# Altium PCB FPGA_DB.PcbDoc (part 3 of 5)
Units mil, origin at the board's own origin, x right, y up, seen from the top; angles counter-clockwise.
Board outline 5980 x 6510 mil, 4 copper layers (Top, Ground Plane, Power Plane, Bottom), stack 61.497 mil thick; 140 components, 246 nets, 1021 pads, 2685 vias.
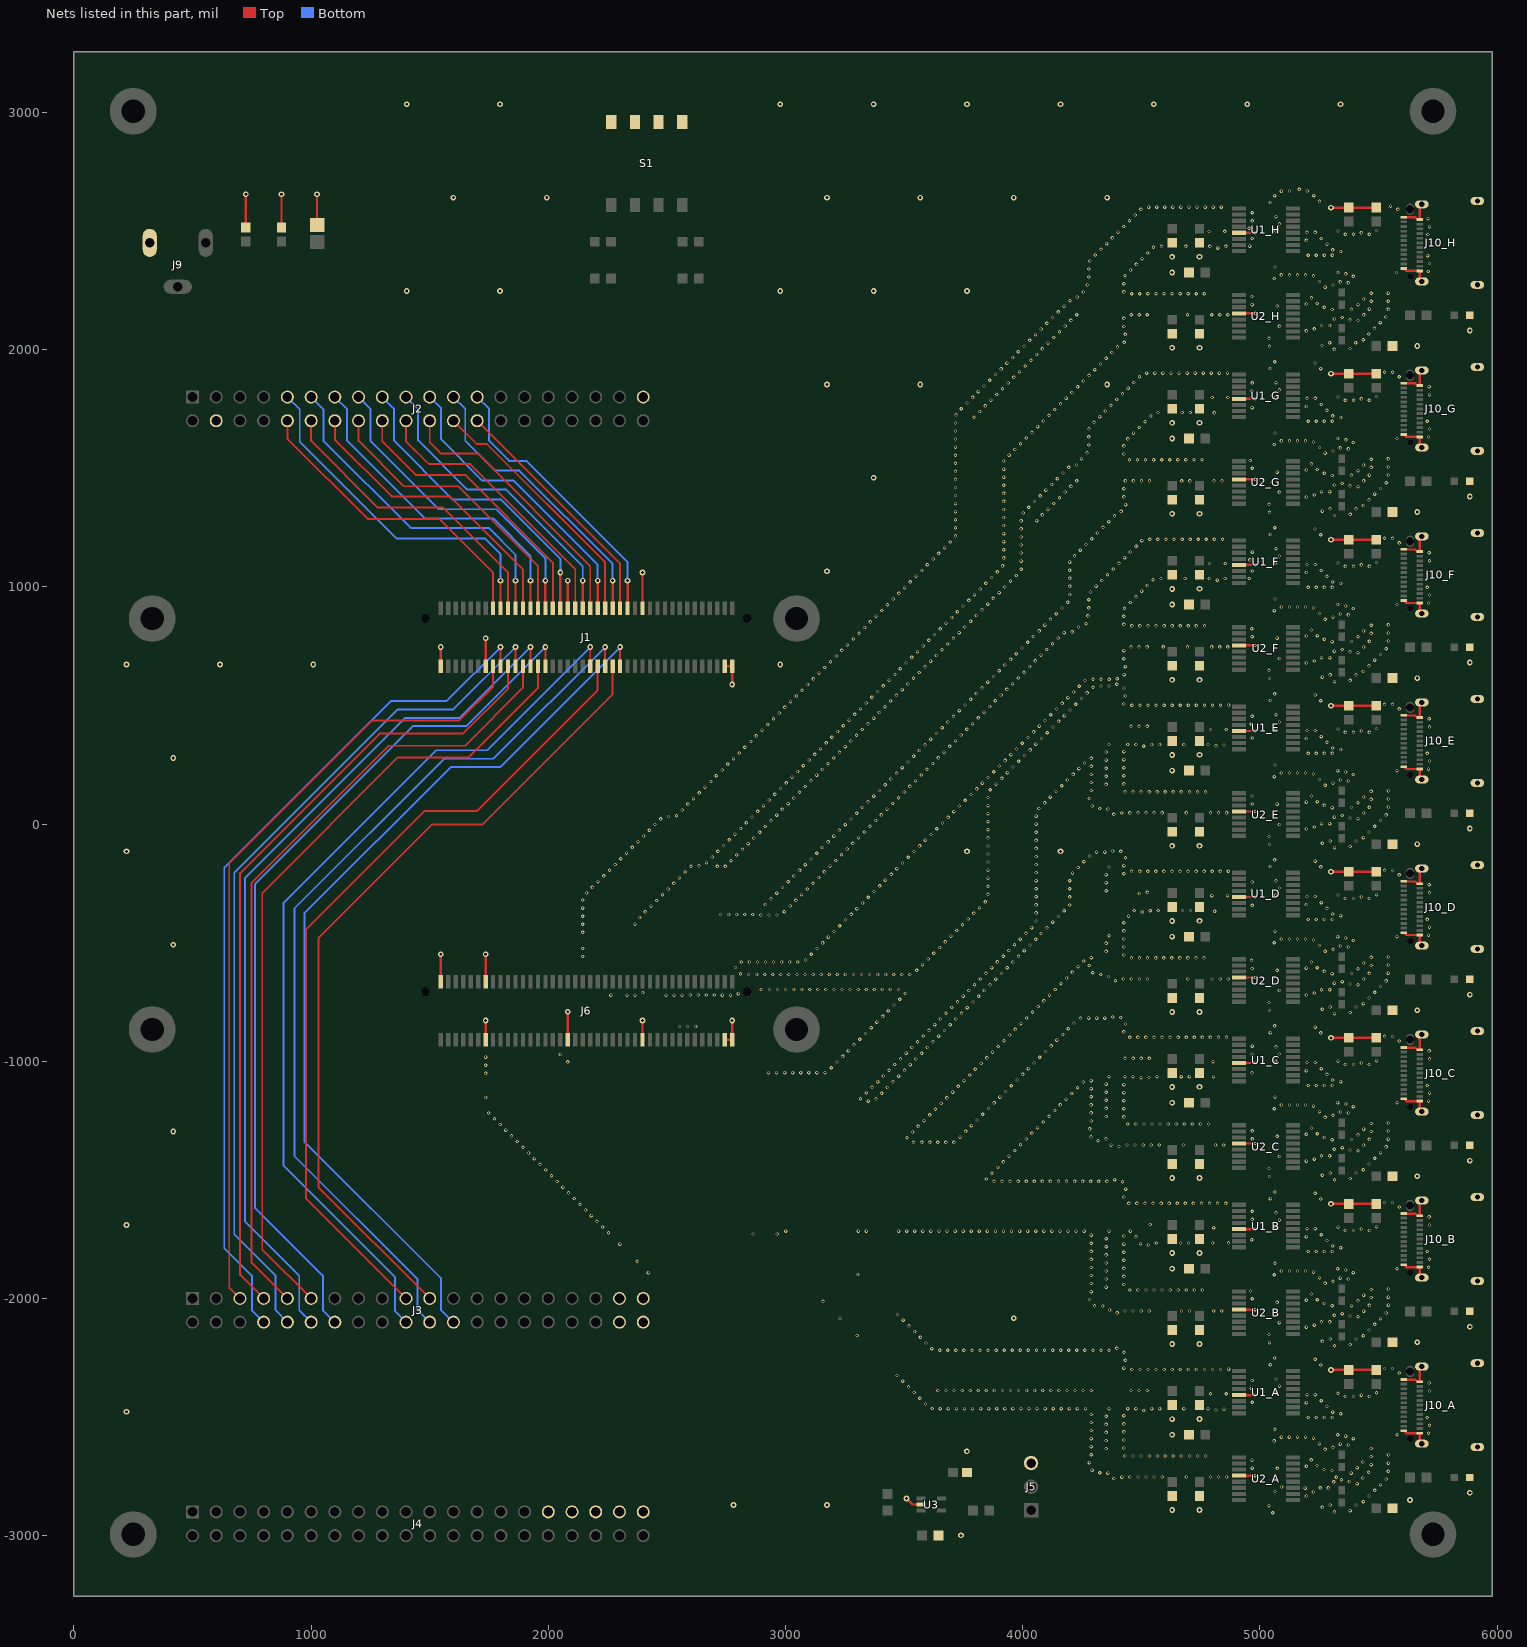
[diagram p5: the nets of this part, all layers, seen from the top]

## Via types
v1: diameter 14, hole 8, Top to Bottom, tented both sides, 2392 vias
v2: diameter 24, hole 12, Top to Bottom, tented both sides, 293 vias

## Nets (pads, with @x,y where several pads share a name; then routed paths per layer and width w, separated by ;. In a path a pad name is that pad's centre, name@x,y a point inside that pad or via, vN(x,y) a via of type N, cw(c..) or ccw(c..) an arc to the next point about the centre after c; other vN are vias at no path point) (continued)
GND: C1.1 C2.1 C3.1 C4.1 C6_A.1 C6_B.1 C6_C.1 C6_D.1 C6_E.1 C6_F.1 C6_G.1 C6_H.1 C7_A.1 C7_B.1 C7_C.1 C7_D.1 C7_E.1 C7_F.1 C7_G.1 C7_H.1 C8_A.2 C8_B.2 C8_C.2 C8_D.2 C8_E.2 C8_F.2 C8_G.2 C8_H.2 C9_A.2 C9_B.2 C9_C.2 C9_D.2 C9_E.2 C9_F.2 C9_G.2 C9_H.2 C10_A.2 C10_B.2 C10_C.2 C10_D.2 C10_E.2 C10_F.2 C10_G.2 C10_H.2 C11_A.2 C11_B.2 C11_C.2 C11_D.2 C11_E.2 C11_F.2 C11_G.2 C11_H.2 D1_A.1 D1_B.1 D1_C.1 D1_D.1 D1_E.1 D1_F.1 D1_G.1 D1_H.1 J1.02 J1.14 J1.35 J1.55 J1.78 J1.80 J2.04 J2.39 J3.37 J3.38 J3.39 J3.40 J4.31 J4.33 J4.35 J4.37 J4.39 J5.3 J6.01 J6.13 J6.14 J6.36 J6.56 J6.78 J6.80 J9.2 J10_A.1 J10_A.2 J10_A.3 J10_A.4 J10_A.A1 J10_A.A12 J10_A.B1 J10_A.B12 J10_B.1 J10_B.2 J10_B.3 J10_B.4 J10_B.A1 J10_B.A12 J10_B.B1 J10_B.B12 J10_C.1 J10_C.2 J10_C.3 J10_C.4 J10_C.A1 J10_C.A12 J10_C.B1 J10_C.B12 J10_D.1 J10_D.2 J10_D.3 J10_D.4 J10_D.A1 J10_D.A12 J10_D.B1 J10_D.B12 J10_E.1 J10_E.2 J10_E.3 J10_E.4 J10_E.A1 J10_E.A12 J10_E.B1 J10_E.B12 J10_F.1 J10_F.2 J10_F.3 J10_F.4 J10_F.A1 J10_F.A12 J10_F.B1 J10_F.B12 J10_G.1 J10_G.2 J10_G.3 J10_G.4 J10_G.A1 J10_G.A12 J10_G.B1 J10_G.B12 J10_H.1 J10_H.2 J10_H.3 J10_H.4 J10_H.A1 J10_H.A12 J10_H.B1 J10_H.B12 R7_A.1 R7_B.1 R7_C.1 R7_D.1 R7_E.1 R7_F.1 R7_G.1 R7_H.1 R10_A.1 R10_B.1 R10_C.1 R10_D.1 R10_E.1 R10_F.1 R10_G.1 R10_H.1 R12.2 S1.1B S1.2B S1.3B S1.4B U1_A.5 U1_B.5 U1_C.5 U1_D.5 U1_E.5 U1_F.5 U1_G.5 U1_H.5 U2_A.12 U2_B.12 U2_C.12 U2_D.12 U2_E.12 U2_F.12 U2_G.12 U2_H.12 U3.2 | length 6375.6
  Top w10: C3.1@725,2514.53 v2(725,2655) ; C2.1@875,2514.53 v2(875,2655) ; C1.1@1025,2525.43 v2(1025,2655) ; J6.01@1546.73,-665.98 v2(1546.73,-548.81) ; J1.02@1546.73,665.83 v2(1546.73,746) ; J6.14@1735.71,-908.98 v2(1735.71,-828.8) ; J6.13@1735.71,-665.98 v2(1735.71,-548.81) ; J1.14@1735.71,665.83 v2(1735.71,783) ; J6.36@2082.17,-908.98 v2(2082.17,-791.8) ; J1.35@2082.17,908.82 v2(2082.17,1026) ; J6.56@2397.13,-908.98 v2(2397.13,-828.8) ; J1.55@2397.13,908.82 v2(2397.13,1060) ; J6.78@2743.58,-908.98 J6.80@2775.08,-908.98 v2(2775.08,-828.8) ; J1.78@2743.58,665.83 J1.80@2775.08,665.83 v2(2775.08,587.91) ; v2(3510,-2843.39) 3535.59,-2868.98 U3.2@3571.69,-2868.98 ; U2_A.12@4910.83,-2747.2 v1(4980.45,-2747.2) ; U1_A.5@4910.83,-2407.8 v1(4980.45,-2407.8) ; U2_B.12@4910.83,-2047.2 v1(4980.45,-2047.2) ; U1_B.5@4910.83,-1707.8 v1(4980.45,-1707.8) ; U2_C.12@4910.83,-1347.2 v1(4980.45,-1347.2) ; U1_C.5@4910.83,-1007.8 v1(4980.45,-1007.8) ; U2_D.12@4910.83,-647.2 v1(4980.45,-647.2) ; U1_D.5@4910.83,-307.8 v1(4980.45,-307.8) ; U2_E.12@4910.83,52.8 v1(4980.45,52.8) ; U1_E.5@4910.83,392.2 v1(4980.45,392.2) ; U2_F.12@4910.83,752.8 v1(4980.45,752.8) ; U1_F.5@4910.83,1092.2 v1(4980.45,1092.2) ; U2_G.12@4910.83,1452.8 v1(4980.45,1452.8) ; U1_G.5@4910.83,1792.2 v1(4980.45,1792.2) ; U2_H.12@4910.83,2152.8 v1(4980.45,2152.8) ; U1_H.5@4910.83,2492.2 v1(4980.45,2492.2) ; v2(5300,-2301.5) C7_A.1@5375,-2301.5 C6_A.1@5490,-2301.5 ; v2(5300,-1601.5) C7_B.1@5375,-1601.5 C6_B.1@5490,-1601.5 ; v2(5300,-901.5) C7_C.1@5375,-901.5 C6_C.1@5490,-901.5 ; v2(5300,-201.5) C7_D.1@5375,-201.5 C6_D.1@5490,-201.5 ; v2(5300,498.5) C7_E.1@5375,498.5 C6_E.1@5490,498.5 ; v2(5300,1198.5) C7_F.1@5375,1198.5 C6_F.1@5490,1198.5 ; v2(5300,1898.5) C7_G.1@5375,1898.5 C6_G.1@5490,1898.5 ; v2(5300,2598.5) C7_H.1@5375,2598.5 C6_H.1@5490,2598.5 ; J10_A.A1@5607.17,-2558.27 5617.01,-2568.11 J10_A.B12@5674.09,-2568.11 5674.09,-2604.33 J10_A.3@5682.36,-2612.6 ; J10_A.A12@5607.17,-2341.73 5608.04,-2342.61 5654.21,-2342.61 5663.17,-2351.57 J10_A.B1@5674.09,-2351.57 5674.09,-2295.67 J10_A.4@5682.36,-2287.4 ; J10_B.A1@5607.17,-1858.27 5617.01,-1868.11 J10_B.B12@5674.09,-1868.11 5674.09,-1904.33 J10_B.3@5682.36,-1912.6 ; J10_B.A12@5607.17,-1641.73 5608.04,-1642.61 5654.21,-1642.61 5663.17,-1651.57 J10_B.B1@5674.09,-1651.57 5674.09,-1595.67 J10_B.4@5682.36,-1587.4 ; J10_C.A1@5607.17,-1158.27 5617.01,-1168.11 J10_C.B12@5674.09,-1168.11 5674.09,-1204.33 J10_C.3@5682.36,-1212.6 ; J10_C.A12@5607.17,-941.73 5608.04,-942.61 5654.21,-942.61 5663.17,-951.57 J10_C.B1@5674.09,-951.57 5674.09,-895.67 J10_C.4@5682.36,-887.4 ; J10_D.A1@5607.17,-458.27 5617.01,-468.11 J10_D.B12@5674.09,-468.11 5674.09,-504.33 J10_D.3@5682.36,-512.6 ; J10_D.A12@5607.17,-241.73 5608.04,-242.61 5654.21,-242.61 5663.17,-251.57 J10_D.B1@5674.09,-251.57 5674.09,-195.67 J10_D.4@5682.36,-187.4 ; J10_E.A1@5607.17,241.73 5617.01,231.89 J10_E.B12@5674.09,231.89 5674.09,195.67 J10_E.3@5682.36,187.4 ; J10_E.A12@5607.17,458.27 5608.04,457.39 5654.21,457.39 5663.17,448.43 J10_E.B1@5674.09,448.43 5674.09,504.33 J10_E.4@5682.36,512.6 ; J10_F.A1@5607.17,941.73 5617.01,931.89 J10_F.B12@5674.09,931.89 5674.09,895.67 J10_F.3@5682.36,887.4 ; J10_F.A12@5607.17,1158.27 5608.04,1157.39 5654.21,1157.39 5663.17,1148.43 J10_F.B1@5674.09,1148.43 5674.09,1204.33 J10_F.4@5682.36,1212.6 ; J10_G.A1@5607.17,1641.73 5617.01,1631.89 J10_G.B12@5674.09,1631.89 5674.09,1595.67 J10_G.3@5682.36,1587.4 ; J10_G.A12@5607.17,1858.27 5608.04,1857.39 5654.21,1857.39 5663.17,1848.43 J10_G.B1@5674.09,1848.43 5674.09,1904.33 J10_G.4@5682.36,1912.6 ; J10_H.A1@5607.17,2341.73 5617.01,2331.89 J10_H.B12@5674.09,2331.89 5674.09,2295.67 J10_H.3@5682.36,2287.4 ; J10_H.A12@5607.17,2558.27 5608.04,2557.39 5654.21,2557.39 5663.17,2548.43 J10_H.B1@5674.09,2548.43 5674.09,2604.33 J10_H.4@5682.36,2612.6
  other v1: 5054.17,-2903.49 5314.69,-2899.66 5380.35,-2894.54 5263.35,-2880.97 5038.05,-2873.55 5295.94,-2871.3 5405.16,-2871.3 5436.2,-2857.41 5195.87,-2833.31 5460.24,-2833.37 5225.33,-2816.33 5063.82,-2814.28 5484.28,-2809.33 5190.89,-2799.68 5254.49,-2798.86 5288.49,-2798.7 5091.72,-2794.84 5508.32,-2785.29 5409.94,-2781.01 5311.22,-2773.41 5377.21,-2771.8 5344.02,-2764.46 5532.37,-2761.24 4384.26,-2759.38 5433.99,-2756.97 4417.77,-2753.59 5322.39,-2753.88 4451.77,-2753.18 4485.77,-2753.18 4519.77,-2753.18 4553.77,-2753.18 4587.77,-2753.18 4689.77,-2753.18 4791.77,-2753.18 4825.77,-2753.18 4859.77,-2753.18 4358.77,-2736.88 5384.58,-2736.58 4324.83,-2735 5458.03,-2732.92 5541.66,-2728.54 5303.99,-2725.29 4292.58,-2724.22 5270.22,-2721.3 5073.01,-2716.54 4967.59,-2715.64 5409.69,-2713.66 5195.57,-2707.61 5240.49,-2704.81 5469.07,-2700.77 5541.66,-2694.54 4280.95,-2692.27 5433.89,-2689.78 4966.86,-2681.65 5216.45,-2680.77 5469.07,-2666.77 4430.83,-2664.46 4464.83,-2664.46 4498.83,-2664.46 4532.83,-2664.46 4566.83,-2664.46 4600.83,-2664.46 4634.83,-2664.46 4668.83,-2664.46 4702.83,-2664.46 4736.83,-2664.46 4770.83,-2664.46 5541.66,-2660.54 4288.44,-2659.11 5274.87,-2636.53 4351.56,-2632.81 5469.07,-2632.77 4426.56,-2630.73 5307.76,-2627.92 4288.44,-2625.11 5372.76,-2618.38 5338.98,-2614.46 5250.83,-2612.49 5060.14,-2600.54 4351.56,-2598.81 4426.56,-2596.73 4288.44,-2591.11 5393.44,-2591.4 5225.99,-2589.26 5090.29,-2584.82 5124.29,-2584.82 5158.29,-2584.82 5192.29,-2584.82 5361.19,-2580.63 5327.68,-2574.88 5578.24,-2574.88 5711.01,-2568.53 4351.56,-2564.81 4426.56,-2562.73 4288.44,-2557.11 5063.34,-2551.59 5715.09,-2534.78 4351.56,-2530.81 4426.56,-2528.73 4288.44,-2523.11 5203.59,-2502.29 5237.59,-2502.29 5271.59,-2502.29 5305.59,-2502.29 5705.34,-2502.2 4351.56,-2496.81 4426.56,-2494.73 4288.44,-2489.11 5340.18,-2486.3 5306.88,-2479.42 4510.15,-2472.36 4814.89,-2470.38 4848.73,-2467.07 3652.51,-2464.95 3686.51,-2464.95 3720.51,-2464.95 3754.51,-2464.95 3788.51,-2464.95 3822.51,-2464.95 3856.51,-2464.95 3890.51,-2464.95 3924.51,-2464.95 3958.51,-2464.95 3992.51,-2464.95 4026.51,-2464.95 4060.51,-2464.95 4094.51,-2464.95 4128.51,-2464.95 4162.51,-2464.95 4196.51,-2464.95 4230.51,-2464.95 4264.51,-2464.95 4363.44,-2464.95 4442.97,-2464.95 4476.97,-2464.95 4543.33,-2464.95 4577.33,-2464.95 4679.33,-2464.95 4781.33,-2464.95 3618.52,-2464.36 5282.67,-2455.55 3590.49,-2445.12 5195.93,-2439.58 4967.59,-2437.8 5258.63,-2431.51 3566.44,-2421.08 5360.4,-2413.7 5394.4,-2413.7 5461.32,-2413.7 5427.86,-2407.66 5198.83,-2405.71 5232.83,-2405.71 4791.94,-2401.82 4858.26,-2401.82 5066.93,-2399.99 5329.44,-2399.65 5491.31,-2397.7 3542.4,-2397.04 5715.11,-2390.28 3642.44,-2388.18 3676.44,-2388.18 3710.44,-2388.18 3744.44,-2388.18 3778.44,-2388.18 3812.44,-2388.18 3846.44,-2388.18 3880.44,-2388.18 3914.44,-2388.18 3948.44,-2388.18 3982.44,-2388.18 4016.44,-2388.18 4050.44,-2388.18 4084.44,-2388.18 4118.44,-2388.18 4152.44,-2388.18 4186.44,-2388.18 4220.44,-2388.18 4254.44,-2388.18 4288.44,-2388.18 4456.39,-2388.18 4490.39,-2388.18 4524.39,-2388.18 4963.49,-2379.68 3518.36,-2373 5082.86,-2369.95 5713.36,-2356.32 3494.32,-2348.96 4967.34,-2345.9 5067.64,-2339.54 3470.28,-2324.91 5587.47,-2314.59 4460.11,-2299.46 4494.11,-2299.46 4528.11,-2299.46 4562.11,-2299.46 4596.11,-2299.46 4630.11,-2299.46 4664.11,-2299.46 4698.11,-2299.46 4732.11,-2299.46 4766.11,-2299.46 4800.11,-2299.46 4834.11,-2299.46 4868.1,-2298.41 5559.22,-2295.67 5525.22,-2295.42 4426.56,-2293.94 5256.65,-2280.55 5043.92,-2279.52 4432.83,-2260.53 5232.6,-2256.51 5062.6,-2251.11 4426.86,-2227.06 3649.98,-2218.44 3683.98,-2218.44 3717.98,-2218.44 3751.98,-2218.44 3785.98,-2218.44 3819.98,-2218.44 3853.98,-2218.44 3887.98,-2218.44 3921.98,-2218.44 3955.98,-2218.44 3989.98,-2218.44 4023.98,-2218.44 4057.98,-2218.44 4091.98,-2218.44 4125.98,-2218.44 4159.98,-2218.44 4193.98,-2218.44 4227.98,-2218.44 4261.98,-2218.44 4295.98,-2218.44 4329.98,-2218.44 4363.98,-2218.44 3616.6,-2211.97 4397.08,-2210.65 5314.69,-2199.66 5380.35,-2194.54 3592.56,-2187.92 5040.65,-2186.37 5263.35,-2180.97 5295.94,-2171.3 5405.16,-2171.3 3568.52,-2163.88 3301.99,-2156.62 5436.2,-2157.41 5038.09,-2152.46 3544.48,-2139.84 5460.24,-2133.37 5195.93,-2121.19 3520.44,-2115.8 5228.88,-2112.78 5484.28,-2109.33 5081.82,-2102.01 5259.83,-2098.7 5293.83,-2098.7 3496.39,-2091.76 5508.32,-2085.29 3229.86,-2084.5 5413.4,-2077.55 5379.55,-2074.41 5313.69,-2071.11 3472.35,-2067.72 5347.03,-2064.46 4398.08,-2060.77 5532.37,-2061.24 5437.44,-2053.51 4431.22,-2053.18 4465.22,-2053.18 4499.22,-2053.18 4533.22,-2053.18 4669.22,-2053.18 4703.22,-2053.18 4805.22,-2053.18 4839.22,-2053.18 4366.32,-2048.61 4336.84,-2031.68 4302.84,-2031.46 5304.35,-2031.08 5385.74,-2030.39 5461.49,-2029.47 5541.66,-2028.54 5271.79,-2021.3 5072.85,-2016.47 3157.74,-2012.37 5413.25,-2010.42 5195.55,-2007.78 5241.51,-2005.83 4281.74,-2004.8 4967.59,-2001.56 5469.07,-1996.32 5541.66,-1994.54 5437.3,-1986.37 5217.47,-1981.79 4288.44,-1971.47 4960,-1968.42 4451.38,-1964.46 4485.38,-1964.46 4519.38,-1964.46 4553.38,-1964.46 4587.38,-1964.46 4621.38,-1964.46 4655.38,-1964.46 4689.38,-1964.46 4723.38,-1964.46 4757.38,-1964.46 5469.07,-1962.32 5541.66,-1960.54 4351.56,-1952.42 4426.56,-1941.22 4288.44,-1937.47 5274.98,-1936.64 5307.82,-1927.84 4351.56,-1918.42 5372.84,-1918.45 5339.08,-1914.46 5250.94,-1912.6 4426.56,-1907.22 4288.44,-1903.47 5060.24,-1900.43 3304.06,-1899.43 2421.93,-1891.57 5393.44,-1891.4 5226.15,-1889.33 5090.45,-1884.82 5124.45,-1884.82 5158.45,-1884.82 5192.45,-1884.82 4351.56,-1884.42 5361.19,-1880.63 5327.68,-1874.88 5578.24,-1874.88 4426.56,-1873.22 4288.44,-1869.47 5711.01,-1868.53 5063.34,-1851.59 4351.56,-1850.42 2373.85,-1843.49 4426.56,-1839.22 4288.44,-1835.47 5715.09,-1834.78 4351.56,-1816.42 4426.56,-1805.22 5203.59,-1802.29 5237.59,-1802.29 5271.59,-1802.29 5305.59,-1802.29 5705.34,-1802.2 4288.44,-1801.47 5340.18,-1786.3 4351.56,-1782.42 5306.88,-1779.42 4529.82,-1774.51 2301.73,-1771.36 4426.56,-1771.22 4496.23,-1769.21 4288.44,-1767.47 4562.91,-1766.72 4664.91,-1766.72 4698.91,-1766.72 4800.91,-1766.72 4867.88,-1765.91 5282.67,-1755.55 4965.25,-1752.68 4351.56,-1748.42 4477.69,-1740.71 5195.93,-1739.58 4426.56,-1737.22 4288.44,-1733.47 5258.63,-1731.51 2862.8,-1728.44 2964.8,-1728.44 2253.64,-1723.28 3000.94,-1716.56 3306.94,-1716.56 3340.94,-1716.56 3476.94,-1716.56 3510.94,-1716.56 3544.94,-1716.56 3578.94,-1716.56 3612.94,-1716.56 3646.94,-1716.56 3680.94,-1716.56 3714.94,-1716.56 3748.94,-1716.56 3782.94,-1716.56 3816.94,-1716.56 3850.94,-1716.56 3884.94,-1716.56 3918.94,-1716.56 3952.94,-1716.56 3986.94,-1716.56 4020.94,-1716.56 4054.94,-1716.56 4088.94,-1716.56 4122.94,-1716.56 4156.94,-1716.56 4190.94,-1716.56 4224.94,-1716.56 4258.94,-1716.56 4363.44,-1716.56 4453.65,-1716.67 5360.4,-1713.7 5394.4,-1713.7 5461.32,-1713.7 5427.86,-1707.66 5198.83,-1705.71 5232.83,-1705.71 4805.24,-1701.76 5066.93,-1699.99 5329.44,-1699.65 2229.6,-1699.24 5491.31,-1697.7 5715.11,-1690.28 4536.99,-1688.18 2205.56,-1675.2 5082.86,-1669.95 4967.41,-1666.78 5713.36,-1656.32 2181.52,-1651.15 5067.64,-1639.54 4967.59,-1632.79 2157.48,-1627.11 5587.47,-1614.59 2133.43,-1603.07 4447.39,-1599.46 4481.39,-1599.46 4515.39,-1599.46 4549.39,-1599.46 4583.39,-1599.46 4617.39,-1599.46 4651.39,-1599.46 4685.39,-1599.46 4719.39,-1599.46 4753.39,-1599.46 4787.39,-1599.46 4821.39,-1599.46 4855.39,-1599.46 5559.22,-1595.67 5525.22,-1595.42 5256.65,-1580.55 5043.92,-1579.52 2109.39,-1579.03 4426.56,-1572.59 5232.6,-1556.51 2085.35,-1554.99 5062.6,-1551.11 4434.39,-1539.5 2061.31,-1530.95 4420.8,-1508.33 2037.27,-1506.9 3878.74,-1506.44 3912.74,-1506.44 3946.74,-1506.44 3980.74,-1506.44 4014.74,-1506.44 4048.74,-1506.44 4082.74,-1506.44 4116.74,-1506.44 4150.74,-1506.44 4184.74,-1506.44 4218.74,-1506.44 4252.74,-1506.44 4286.74,-1506.44 4320.74,-1506.44 4354.74,-1506.44 5314.69,-1499.66 4388,-1499.39 3846.24,-1496.45 5380.35,-1494.54 5040.65,-1486.37 2013.23,-1482.86 5263.35,-1480.97 3870.28,-1472.41 5295.94,-1471.3 5405.16,-1471.3 1989.19,-1458.82 5436.2,-1457.41 5038.09,-1452.46 3894.32,-1448.36 1965.14,-1434.78 5460.24,-1433.37 3918.36,-1424.32 5195.93,-1421.19 5228.88,-1412.78 1941.1,-1410.74 5484.28,-1409.33 5081.82,-1402.01 3942.4,-1400.28 5259.83,-1398.7 5293.83,-1398.7 1917.06,-1386.7 5508.32,-1385.29 5413.4,-1377.55 3966.45,-1376.24 5379.55,-1374.41 5313.69,-1371.11 5347.03,-1364.46 1893.02,-1362.65 5532.37,-1361.24 4406.09,-1359.26 4372.53,-1353.79 5437.44,-1353.51 4439.54,-1353.18 4473.54,-1353.18 4507.54,-1353.18 4541.54,-1353.18 4575.54,-1353.18 4677.54,-1353.18 4813.54,-1353.18 4847.54,-1353.18 3990.49,-1352.2 3539.75,-1342.3 3573.75,-1342.3 3607.75,-1342.3 3641.75,-1342.3 3675.75,-1342.3 3709.75,-1342.3 1868.98,-1338.61 4317.76,-1335.34 5304.35,-1331.08 5385.74,-1330.39 5461.49,-1329.47 5541.66,-1328.54 4014.53,-1328.16 4350.86,-1327.59 4967.59,-1327.44 3512.05,-1322.59 5271.79,-1321.3 3735.4,-1319.97 4288.04,-1318.82 5072.85,-1316.47 1844.94,-1314.57 5413.25,-1310.42 5195.55,-1307.78 5241.51,-1305.83 4038.57,-1304.12 3536.09,-1298.55 3759.44,-1295.93 5469.07,-1296.32 5541.66,-1294.54 4967.59,-1293.44 1820.89,-1290.53 5437.3,-1286.37 4282.23,-1285.32 5217.47,-1281.79 4062.61,-1280.07 3560.13,-1274.51 3783.48,-1271.89 1796.85,-1266.49 4442.94,-1264.46 4476.94,-1264.46 4510.94,-1264.46 4544.94,-1264.46 4578.94,-1264.46 4612.94,-1264.46 4646.94,-1264.46 4680.94,-1264.46 4714.94,-1264.46 4748.94,-1264.46 4782.94,-1264.46 5469.07,-1262.32 5541.66,-1260.54 4086.65,-1256.03 4288.44,-1251.89 3584.17,-1250.46 3807.52,-1247.84 1772.81,-1242.45 5274.98,-1236.64 4426.56,-1234.66 4351.56,-1232.81 4110.69,-1231.99 5307.82,-1227.84 3608.21,-1226.42 3831.56,-1223.8 1748.77,-1218.4 4288.44,-1217.89 5372.84,-1218.45 5339.08,-1214.46 5250.94,-1212.6 4134.74,-1207.95 3632.26,-1202.38 4426.56,-1200.66 3855.6,-1199.76 5060.24,-1200.43 4351.56,-1198.81 5393.44,-1191.4 5226.15,-1189.33 5090.45,-1184.82 5124.45,-1184.82 5158.45,-1184.82 5192.45,-1184.82 4158.78,-1183.91 4288.44,-1183.89 5361.19,-1180.63 3656.3,-1178.34 3879.64,-1175.72 5327.68,-1174.88 5578.24,-1174.88 5711.01,-1168.53 3348.74,-1168.44 4426.56,-1166.66 4351.56,-1164.81 4182.82,-1159.87 3381.4,-1158.97 3316.26,-1158.37 3680.34,-1154.3 1735.64,-1153.04 3903.69,-1151.68 5063.34,-1151.59 4288.44,-1149.89 4206.86,-1135.82 3405.44,-1134.93 5715.09,-1134.78 3340.31,-1134.33 4426.56,-1132.66 4351.56,-1130.81 3704.38,-1130.26 3927.73,-1127.64 4288.44,-1115.89 4230.9,-1111.78 3429.48,-1110.89 3364.35,-1110.29 3728.42,-1106.21 3951.77,-1103.59 5203.59,-1102.29 5237.59,-1102.29 5271.59,-1102.29 5305.59,-1102.29 5705.34,-1102.2 4426.56,-1098.66 4351.56,-1096.81 4254.94,-1087.74 3453.52,-1086.84 3388.39,-1086.25 5340.18,-1086.3 3752.46,-1082.17 4288.44,-1081.89 3975.81,-1079.55 5306.88,-1079.42 4498.69,-1069.25 4532.68,-1068.48 4363.44,-1064.95 4430.96,-1064.95 4464.96,-1064.95 4566.49,-1064.95 4668.49,-1064.95 4702.49,-1064.95 4804.49,-1064.95 3477.56,-1062.8 3412.43,-1062.21 3776.51,-1058.13 3999.85,-1055.51 5282.67,-1055.55 1735.64,-1051.04 4966.7,-1049.01 2928.17,-1048.44 2962.17,-1048.44 2996.17,-1048.44 3030.17,-1048.44 3064.17,-1048.44 3098.17,-1048.44 3132.17,-1048.44 3166.17,-1048.44 5195.93,-1039.58 3501.6,-1038.76 3436.47,-1038.16 3800.55,-1034.09 5258.63,-1031.51 4023.89,-1031.47 3192.92,-1027.45 1735.64,-1017.04 3525.64,-1014.72 3460.51,-1014.12 5360.4,-1013.7 5394.4,-1013.7 5461.32,-1013.7 3824.59,-1010.05 5427.86,-1007.66 4047.94,-1007.43 5198.83,-1005.71 5232.83,-1005.71 2082.1,-1002.58 3216.96,-1003.4 4802.03,-1001.82 5066.93,-999.99 5329.44,-999.65 5491.31,-997.7 3549.69,-990.68 3484.56,-990.08 5715.11,-990.28 4431.37,-988.18 4465.37,-988.18 4499.37,-988.18 4533.37,-988.18 3848.63,-986.01 1735.64,-983.04 4071.98,-983.39 3241,-979.36 2050.74,-971.48 4966.94,-970.39 5082.86,-969.95 3573.73,-966.64 3508.6,-966.04 3872.67,-961.96 4096.02,-959.34 5713.36,-956.32 3265.04,-955.32 3597.77,-942.59 3532.64,-942 5067.64,-939.54 3896.71,-937.92 4967.59,-936.39 4120.06,-935.3 3289.08,-931.28 3621.81,-918.55 3556.68,-917.96 5587.47,-914.59 3920.75,-913.88 4144.1,-911.26 3313.13,-907.24 4451.23,-899.46 4485.23,-899.46 4519.23,-899.46 4553.23,-899.46 4587.23,-899.46 4621.23,-899.46 4655.23,-899.46 4689.23,-899.46 4723.23,-899.46 4757.23,-899.46 4791.23,-899.46 4825.23,-899.46 4859.23,-899.46 5559.22,-895.67 3645.85,-894.51 5525.22,-895.42 3580.72,-893.91 3944.8,-889.84 4168.14,-887.22 3337.17,-883.2 5256.65,-880.55 5043.92,-879.52 4426.56,-876.07 3604.76,-869.87 3669.89,-870.47 3968.84,-865.8 4192.19,-863.18 3361.21,-859.15 5232.6,-856.51 2552.95,-853.4 2586.95,-853.4 2620.95,-853.4 5062.6,-851.11 3628.81,-845.83 3693.94,-846.43 4433.57,-842.79 3992.88,-841.76 4216.23,-839.14 3385.25,-835.11 3652.85,-821.79 3717.98,-822.39 4243.81,-819.25 4016.92,-817.71 4277.8,-818.44 4311.8,-818.44 4345.8,-818.44 4413.45,-815.38 4379.49,-813.86 3409.29,-811.07 5314.69,-799.66 3676.89,-797.75 3742.02,-798.34 5380.35,-794.54 4040.96,-793.67 3433.33,-787.03 5040.65,-786.37 5263.35,-780.97 3700.93,-773.71 3766.06,-774.3 5295.94,-771.3 5405.16,-771.3 4065,-769.63 3457.38,-762.99 5436.2,-757.41 5038.09,-752.46 3724.97,-749.66 3790.1,-750.26 4089.05,-745.59 3481.42,-738.95 5460.24,-733.37 3749.01,-725.62 3814.14,-726.22 2263.79,-721.56 2331.79,-721.56 2365.79,-721.56 2495.79,-721.56 2529.79,-721.56 2563.79,-721.54 2767.78,-721.56 4113.09,-721.55 2597.79,-721.21 2631.78,-720.88 2665.78,-720.8 2699.78,-721.13 2733.78,-721.46 5195.93,-721.19 2801.19,-715.23 3505.46,-714.9 5228.88,-712.78 2397.89,-710.36 5484.28,-709.33 3773.06,-701.58 3838.19,-702.18 5081.82,-702.01 5259.83,-698.7 5293.83,-698.7 2898.22,-697.55 2932.22,-697.55 2966.22,-697.55 3000.22,-697.55 3034.22,-697.55 3068.22,-697.55 3102.22,-697.55 3136.22,-697.55 3170.22,-697.55 3204.22,-697.55 3238.22,-697.55 3272.22,-697.55 3306.22,-697.55 3340.22,-697.55 3374.22,-697.55 3408.22,-697.55 3442.22,-697.55 3476.22,-697.55 4137.13,-697.51 5508.32,-685.29 3797.1,-677.54 3862.23,-678.14 5413.4,-677.55 5379.55,-674.41 4161.17,-673.47 5313.69,-671.11 5347.03,-664.46 4391.01,-660.65 5532.37,-661.24 3886.27,-654.09 5437.44,-653.51 3821.14,-653.5 4424.18,-653.18 4458.18,-653.18 4492.18,-653.18 4526.18,-653.18 4696.18,-653.18 4798.18,-653.18 4832.18,-653.18 4866.18,-653.18 4185.21,-649.42 4362.02,-642.88 2844.29,-634.42 2878.29,-634.42 2912.29,-634.42 2946.29,-634.42 2980.29,-634.42 3014.29,-634.42 3048.29,-634.42 3082.29,-634.42 3116.29,-634.42 3150.29,-634.42 3184.29,-634.42 3218.29,-634.42 3252.29,-634.42 3286.29,-634.42 3320.29,-634.42 3354.29,-634.42 3388.29,-634.42 3422.29,-634.42 3456.29,-634.42 3490.29,-634.42 3524.29,-634.42 4329.15,-634.21 2810.45,-631.12 5304.35,-631.08 3910.31,-630.05 5385.74,-630.39 3845.18,-629.46 5461.49,-629.47 5541.66,-628.54 4295.91,-627.05 4209.25,-625.38 5271.79,-621.3 3553.44,-616.92 5072.85,-616.47 5413.25,-610.42 4967.08,-608.94 5195.55,-607.78 3934.35,-606.01 5241.51,-605.83 2788.8,-604.9 3869.22,-605.41 4233.3,-601.34 4280.67,-596.66 5469.07,-596.32 5541.66,-594.54 3577.48,-592.88 5437.3,-586.37 2813.53,-581.56 2847.53,-581.56 2881.53,-581.56 2915.53,-581.56 2949.53,-581.56 2983.53,-581.56 3017.53,-581.56 3051.53,-581.56 3958.39,-581.97 5217.47,-581.79 3893.26,-581.37 4257.34,-577.3 4964.55,-575.04 3084.43,-573 3601.52,-568.84 4288.44,-563.56 4458.4,-564.46 4492.4,-564.46 4526.4,-564.46 4560.4,-564.46 4594.4,-564.46 4628.4,-564.46 4662.4,-564.46 4696.4,-564.46 4730.4,-564.46 4764.4,-564.46 5469.07,-562.32 5541.66,-560.54 2145.09,-558.75 3982.44,-557.93 3917.31,-557.33 4426.56,-552.52 3108.57,-549.06 3625.57,-544.8 4351.56,-537.06 5274.98,-536.64 4006.48,-533.89 3941.35,-533.29 5307.82,-527.84 2145.09,-524.75 3132.62,-525.02 3649.61,-520.76 4426.56,-518.52 5372.84,-518.45 5339.08,-514.46 5250.94,-512.6 4030.52,-509.84 3965.39,-509.25 4351.56,-503.06 3156.66,-500.98 5060.24,-500.43 3673.65,-496.72 5393.44,-491.4 5226.15,-489.33 4054.56,-485.8 3989.43,-485.21 4426.56,-484.52 5090.45,-484.82 5124.45,-484.82 5158.45,-484.82 5192.45,-484.82 5361.19,-480.63 3180.7,-476.94 5327.68,-474.88 5578.23,-474.88 3697.69,-472.67 4363.44,-471.2 5711.01,-468.53 4078.6,-461.76 4013.47,-461.16 2145.09,-456.75 3204.74,-452.89 5063.34,-451.59 4426.56,-450.52 3721.73,-448.63 4102.64,-437.72 4037.51,-437.12 5715.09,-434.78 3228.78,-428.85 3745.77,-424.59 2145.09,-422.75 2365.7,-422.38 4426.56,-416.52 4126.69,-413.68 4056.27,-408.77 3252.82,-404.81 5203.59,-402.29 5237.59,-402.29 5271.59,-402.29 5305.59,-402.29 5705.34,-402.2 3769.81,-400.55 2385.14,-394.49 4150.73,-389.64 2145.09,-388.75 4446.01,-388.63 5340.18,-386.3 2896.04,-383.44 2930.04,-383.44 2964.04,-383.44 2726.09,-381.56 2760.09,-381.56 2794.09,-381.56 2828.09,-381.56 2862.09,-381.33 3276.87,-380.77 5306.88,-379.42 3793.86,-376.51 4056.56,-374.77 4503.86,-371.01 2409.18,-370.44 2995.3,-370.07 4809.31,-367.63 4174.77,-365.59 4537.43,-365.59 4470.41,-364.95 4571.42,-364.95 4673.42,-364.95 4707.42,-364.95 3300.91,-356.73 5282.67,-355.55 2145.09,-354.75 3817.9,-352.47 2433.23,-346.4 3019.34,-346.02 4967.47,-343.13 4056.56,-340.77 4198.44,-341.19 2915.12,-339.52 5195.93,-339.58 3324.95,-332.69 5258.63,-331.51 3841.94,-328.42 2457.27,-322.36 3043.38,-321.98 2145.09,-320.75 2939.16,-315.48 5360.4,-313.7 5394.4,-313.7 5461.32,-313.7 3348.99,-308.65 5427.86,-307.66 4056.56,-306.77 4198.44,-307.19 5198.83,-305.71 5232.83,-305.71 4797.2,-301.82 4863.37,-301.82 5066.93,-299.99 5329.44,-299.65 2481.31,-298.32 3067.42,-297.94 5491.31,-297.7 3853.44,-296.43 4491.89,-292.74 2161.43,-290.93 2963.2,-291.44 5715.11,-290.28 4525.58,-288.18 3373.03,-284.6 4351.56,-281.42 4964.18,-278.51 2505.35,-274.28 3091.46,-273.9 4056.56,-272.77 4198.44,-273.19 5082.86,-269.95 2185.47,-266.89 2987.24,-267.39 3853.44,-262.43 3397.07,-260.56 5713.36,-256.32 2529.39,-250.24 3115.51,-249.86 4351.56,-247.42 4967.18,-244.65 2209.51,-242.85 3011.28,-243.35 5067.64,-239.54 4056.56,-238.77 4198.44,-239.19 3421.12,-236.52 3853.44,-228.43 2553.43,-226.19 3139.55,-225.82 2233.55,-218.81 3035.33,-219.31 5587.47,-214.59 4351.56,-213.42 3445.16,-212.48 4426.56,-209.68 4209.55,-207.05 4056.56,-204.77 2577.48,-202.15 3163.59,-201.77 4458.99,-199.46 4492.99,-199.46 4526.99,-199.46 4560.99,-199.46 4594.99,-199.46 4628.99,-199.46 4662.99,-199.46 4696.99,-199.46 4730.99,-199.46 4764.99,-199.46 4798.99,-199.46 4832.99,-199.46 4866.99,-199.11 5559.22,-195.67 2257.6,-194.77 3059.37,-195.27 5525.22,-195.42 3853.44,-194.43 3469.2,-188.44 4233.59,-183.01 4363.44,-181.56 5256.65,-180.55 5043.92,-179.52 2601.52,-178.11 2712.08,-178.44 2746.08,-178.44 3187.63,-177.73 2635.48,-176.56 4426.56,-175.68 2281.64,-170.73 3083.41,-171.23 4056.56,-170.77 3493.24,-164.4 2666.65,-162.98 3853.44,-160.43 4257.64,-158.97 5232.6,-156.51 2770.54,-154.83 3211.67,-153.69 5062.6,-151.11 2305.68,-146.68 3107.45,-147.19 4433.49,-142.39 3517.28,-140.35 2690.69,-138.94 4056.56,-136.77 4281.68,-134.93 2794.58,-130.78 3235.71,-129.65 3853.44,-126.43 2329.72,-122.64 3131.49,-123.14 4311.41,-118.44 4345.41,-118.44 3541.32,-116.31 2714.74,-114.9 4413.1,-115.19 4379.12,-113.99 2818.62,-106.74 3259.76,-105.61 4056.56,-102.77 5314.69,-99.66 2353.76,-98.6 3155.53,-99.1 5380.35,-94.54 3565.37,-92.27 3853.44,-92.43 2738.78,-90.86 5040.65,-86.37 2842.66,-82.7 3283.8,-81.57 5263.35,-80.97 2377.8,-74.56 3179.58,-75.06 5295.94,-71.3 5405.16,-71.3 4056.56,-68.77 3589.41,-68.23 2762.82,-66.82 2866.71,-58.66 3307.84,-57.52 3853.44,-58.43 5436.2,-57.41 5038.09,-52.46 2401.85,-50.52 3203.62,-51.02 3613.45,-44.19 2786.86,-42.78 2890.75,-34.62 4056.56,-34.77 3331.88,-33.48 5460.24,-33.37 3227.66,-26.98 2425.89,-26.48 3853.44,-24.43 5195.93,-21.19 3637.49,-20.15 2810.9,-18.73 5228.88,-12.78 2914.79,-10.58 3355.92,-9.44 5484.28,-9.33 3251.7,-2.94 2449.93,-2.43 5081.82,-2.01 4056.56,-0.77 5259.83,1.3 5293.83,1.3 3661.53,3.9 2834.94,5.31 3853.44,9.57 2938.83,13.47 3379.96,14.6 5508.32,14.71 3275.74,21.11 2473.97,21.61 5413.4,22.45 5379.55,25.59 3685.57,27.94 2858.99,29.35 5313.69,28.89 2506.48,31.56 4056.56,33.23 2540.31,34.95 5347.03,35.54 2962.87,37.51 3404.01,38.64 5532.37,38.75 4384.17,40.66 3853.44,43.57 3299.78,45.15 4417.69,46.36 5437.44,46.49 4451.68,46.82 4485.68,46.82 4519.68,46.82 4553.68,46.82 4587.68,46.82 4689.68,46.82 4791.68,46.82 4825.68,46.82 4859.68,46.82 3709.62,51.98 2883.03,53.39 2564.35,58.99 2986.91,61.55 3428.05,62.68 4358.74,63.22 4068.2,65.18 4324.79,65 3323.83,69.19 5304.35,68.92 5385.74,69.61 5461.49,70.53 5541.66,71.46 3733.66,76.02 4292.55,75.81 2907.07,77.43 3853.44,77.57 5271.79,78.7 2588.39,83.03 4967.59,84.27 5072.85,83.53 3010.96,85.59 3452.09,86.73 4092.24,89.22 5413.25,89.58 5195.55,92.22 3347.87,93.23 5241.51,94.17 3757.7,100.06 2931.11,101.47 5469.07,103.68 5541.66,105.46 2612.44,107.07 4280.96,107.77 3035,109.63 3476.13,110.77 3853.44,111.57 4116.28,113.26 5437.3,113.63 3371.91,117.27 4966.87,118.26 5217.47,118.21 3781.74,124.1 2955.15,125.52 2636.48,131.11 3059.04,133.67 3500.17,134.81 4430.91,135.54 4464.91,135.54 4498.91,135.54 4532.91,135.54 4566.91,135.54 4600.91,135.54 4634.91,135.54 4668.91,135.54 4702.91,135.54 4736.91,135.54 4770.91,135.54 4140.33,137.3 5469.07,137.68 5541.66,139.46 3395.95,141.31 4288.44,140.94 3862.96,144.21 3805.78,148.15 2979.19,149.56 2660.52,155.16 3083.08,157.72 3524.21,158.85 4164.37,161.34 5274.98,163.36 3419.99,165.36 4351.56,167.19 3887,168.25 4426.56,169.26 3829.82,172.19 5307.82,172.16 3003.24,173.6 4288.44,174.94 2684.56,179.2 3107.12,181.76 5372.84,181.55 3548.26,182.89 4188.41,185.39 5339.08,185.54 5250.94,187.4 3444.03,189.4 3911.04,192.3 3853.87,196.23 3027.28,197.64 5060.24,199.57 4351.56,201.19 2708.6,203.24 4426.56,203.26 3131.16,205.8 3572.3,206.93 4212.45,209.43 4288.44,208.94 5393.44,208.6 5226.15,210.67 3468.08,213.44 5090.45,215.18 5124.45,215.18 5158.45,215.18 5192.45,215.18 3935.09,216.34 5361.19,219.37 3877.91,220.27 3051.32,221.68 5327.68,225.12 5578.23,225.12 2732.64,227.28 3155.2,229.84 3596.34,230.98 5711.01,231.47 4236.49,233.47 4351.56,235.19 3492.12,237.48 4426.56,237.26 3959.13,240.38 4288.44,242.94 3901.95,244.31 3075.36,245.72 5063.34,248.41 2756.69,251.32 3179.25,253.88 3620.38,255.02 4260.53,257.51 3516.16,261.52 3983.17,264.42 5715.09,265.22 3925.99,268.35 4351.56,269.19 3099.4,269.77 4426.56,271.26 2780.73,275.36 4288.44,276.94 3203.29,277.92 3644.42,279.06 3540.2,285.56 4007.21,288.46 3950.03,292.4 3123.44,293.81 5203.59,297.71 5237.59,297.71 5271.59,297.71 5305.59,297.71 5705.34,297.8 2804.77,299.41 3227.33,301.97 3668.46,303.1 4351.56,303.19 4426.56,305.26 3564.24,309.61 4031.25,312.5 5340.18,313.7 3974.07,316.44 3147.49,317.85 5306.88,320.58 2828.81,323.45 3251.37,326.01 3692.51,327.14 4510.13,327.64 4814.88,329.63 4848.72,332.92 3588.28,333.65 4363.44,335.05 4442.95,335.05 4476.95,335.05 4543.31,335.05 4577.31,335.05 4679.31,335.05 4781.31,335.05 4055.29,336.54 3998.12,340.48 3171.53,341.89 5282.67,344.45 2852.85,347.49 3275.41,350.05 3716.55,351.18 3612.32,357.69 5195.93,360.42 4079.34,360.59 4967.59,362.19 4022.16,364.52 3195.57,365.93 5258.63,368.49 2876.89,371.53 3299.45,374.09 3740.59,375.22 3636.37,381.73 4103.38,384.63 5360.4,386.3 5394.4,386.3 5461.32,386.3 4046.2,388.56 3219.61,389.97 5427.86,392.34 5198.83,394.29 5232.83,394.29 2900.94,395.57 3323.5,398.13 4791.96,398.18 4858.27,398.18 3764.63,399.27 5066.93,400.01 5329.44,400.35 5491.31,402.3 3660.41,405.77 4127.42,408.67 5715.11,409.73 4456.4,411.82 4490.4,411.82 4524.4,411.82 4070.24,412.6 3243.65,414.02 2924.98,419.61 4963.5,420.34 3347.54,422.17 3788.67,423.31 3684.45,429.81 5082.86,430.05 4151.46,432.71 4094.28,436.65 3267.69,438.06 2949.02,443.66 5713.36,443.68 3371.58,446.22 3812.71,447.35 3708.49,453.86 4967.34,454.12 4175.5,456.75 5067.64,460.46 4118.32,460.69 3291.73,462.1 2973.06,467.7 3395.62,470.26 3836.76,471.39 3732.53,477.9 4199.54,480.79 4142.37,484.73 5587.47,485.42 3315.78,486.14 2997.1,491.74 3419.66,494.3 3860.8,495.43 4460.1,500.54 4494.1,500.54 4528.1,500.54 4562.1,500.54 4596.1,500.54 4630.1,500.54 4664.1,500.54 4698.1,500.54 4732.1,500.54 4766.1,500.54 4800.1,500.54 4834.1,500.54 3756.57,501.94 4868.08,501.58 5559.22,504.33 4223.59,504.84 5525.22,504.58 4426.56,506.14 4166.41,508.77 3339.82,510.18 3021.14,515.78 3443.7,518.34 3884.84,519.47 5256.64,519.45 5043.92,520.48 3780.62,525.98 4247.63,528.88 4190.45,532.81 3363.86,534.22 3045.19,539.82 4432.86,539.55 3467.75,542.38 5232.6,543.49 3908.88,543.52 5062.6,548.89 3804.66,550.02 4271.67,552.92 4214.49,556.85 3387.9,558.27 3069.23,563.86 3491.79,566.42 3932.92,567.56 4426.81,573.01 3828.7,574.06 4296.31,576.34 4238.53,580.9 3411.94,582.31 4329.91,581.56 4363.91,581.56 3093.27,587.91 4397,589.37 3515.83,590.47 3956.96,591.6 3852.74,598.1 5314.69,600.35 4262.57,604.94 5380.35,605.45 3435.98,606.35 4296.19,610.05 4330.19,610.05 4364.19,610.05 3117.31,611.95 4398.1,612.47 5040.65,613.63 3539.87,614.51 3981,615.64 5263.34,619.02 3876.78,622.15 5295.93,628.7 5405.15,628.7 3460.03,630.39 4427.47,629.59 3141.35,635.99 3563.91,638.55 4005.05,639.68 5436.19,642.58 3900.82,646.19 5038.09,647.54 3484.07,654.43 3165.39,660.03 3587.95,662.59 4432.47,663.22 4029.09,663.72 5460.23,666.62 3924.87,670.23 3508.11,678.47 5195.93,678.81 3189.44,684.07 3612,686.63 5228.88,687.22 4053.13,687.77 5484.27,690.66 3948.91,694.27 4426.56,696.71 5081.82,697.99 5259.83,701.3 5293.83,701.3 3532.15,702.51 3213.48,708.11 3636.04,710.67 4077.17,711.81 5508.32,714.7 3972.95,718.31 5413.4,722.45 5379.55,725.59 3556.19,726.56 5313.69,728.89 4426.56,730.71 3237.52,732.15 3660.08,734.72 4101.21,735.85 5347.03,735.54 5532.36,738.75 3996.99,742.35 5437.44,746.49 4456.5,746.82 4490.5,746.82 4524.5,746.82 4592.5,746.82 4694.5,746.82 4796.5,746.82 4830.5,746.82 4864.5,746.82 3580.23,750.6 3261.56,756.2 3684.12,758.76 4125.25,759.89 4021.03,766.4 5304.35,768.92 5385.74,769.61 5461.49,770.53 5541.66,771.45 3604.28,774.64 5271.79,778.7 3285.6,780.24 3708.16,782.8 4149.3,783.93 5072.85,783.53 4967.33,789.21 4045.07,790.44 5413.25,789.58 5195.55,792.22 5241.51,794.17 3628.32,798.68 3309.64,804.28 5469.07,803.68 5541.66,805.45 3732.2,806.84 4174.72,806.5 4208.55,809.95 4069.12,814.48 5437.3,813.63 5217.47,818.21 3652.36,822.72 4965.31,823.15 3333.69,828.32 3756.25,830.88 4235.37,830.85 4460.01,835.54 4494.01,835.54 4528.01,835.54 4562.01,835.54 4596.01,835.54 4630.01,835.54 4664.01,835.54 4698.01,835.54 4732.01,835.54 4766.01,835.54 5469.07,837.68 4093.16,838.52 5541.66,839.45 4426.56,841.64 4266.55,844.39 3676.4,846.76 3357.73,852.36 3780.29,854.92 4117.2,862.56 5274.98,863.36 3700.44,870.81 5307.82,872.16 3381.77,876.4 4426.56,875.64 4274.72,877.4 3804.33,878.97 5372.84,881.55 5339.08,885.54 4141.24,886.6 5250.94,887.4 3724.48,894.85 3405.81,900.45 5060.24,899.57 3828.37,903.01 5393.44,908.6 4429.18,909.54 4165.28,910.65 4278.44,911.19 5226.15,910.67 5090.45,915.18 5124.45,915.18 5158.45,915.18 5192.45,915.18 3748.53,918.89 5361.19,919.37 3429.85,924.49 5327.68,925.12 5578.22,925.12 3852.41,927.05 5711,931.46 4453.22,933.58 4189.21,934.8 3772.57,942.93 4278.44,945.19 5063.34,948.41 3453.89,948.53 3876.45,951.09 4477.26,957.63 5715.09,965.21 3796.61,966.97 4197.72,967.72 3477.94,972.57 3900.5,975.13 4285.81,978.39 4501.3,981.67 3820.65,991.01 3501.98,996.61 5203.59,997.71 5237.59,997.71 5271.59,997.71 5305.59,997.71 5705.35,997.79 3924.54,999.17 4197.72,1001.72 4309.69,1002.59 4525.35,1005.71 5340.18,1013.7 3844.69,1015.06 3526.02,1020.65 5306.88,1020.58 3948.58,1023.21 4333.73,1026.63 4820.28,1028.25 4549.39,1029.75 4582.97,1035.05 4684.97,1035.05 4786.97,1035.05 4853.6,1035.05 4955,1034.96 4197.72,1035.72 3868.73,1039.1 5282.67,1044.45 3550.06,1044.7 3972.62,1047.26 4357.77,1050.67 5195.93,1060.42 3892.78,1063.14 4967.59,1066.55 5258.63,1068.49 3574.1,1068.74 4197.72,1069.72 3993.44,1074.14 4381.81,1074.72 5360.4,1086.3 5394.4,1086.3 5461.32,1086.3 3915.56,1088.37 5427.86,1092.34 3598.14,1092.78 5198.83,1094.29 5232.83,1094.29 4787.11,1098.18 4853.72,1098.18 4405.85,1098.76 5066.93,1100.01 5329.44,1100.35 5491.31,1102.3 4197.72,1103.72 3993.44,1108.14 5715.11,1109.75 4957.51,1113.66 3622.18,1116.82 3919.56,1122.14 4429.9,1122.8 5082.86,1130.05 4218.59,1130.56 3646.23,1140.86 3993.44,1142.14 5713.35,1143.7 4967.59,1146.13 4453.94,1146.84 4242.63,1154.61 3919.56,1156.14 5067.64,1160.46 3670.27,1164.9 4477.98,1170.88 3993.44,1176.14 4266.67,1178.65 5587.45,1185.43 3694.31,1188.95 3919.56,1190.14 4502.48,1194.46 4535.93,1200.54 4569.93,1200.54 4603.93,1200.54 4637.93,1200.54 4671.93,1200.54 4705.93,1200.54 4739.93,1200.54 4773.93,1200.54 4807.93,1200.54 4841.93,1200.54 4290.71,1202.69 5559.19,1204.34 5525.19,1204.58 3993.44,1210.14 3716.44,1214.76 5256.63,1219.47 5043.92,1220.48 3919.56,1224.14 4314.75,1226.73 3993.44,1244.14 5232.59,1243.51 3716.44,1248.76 5062.6,1248.89 4338.79,1250.77 3919.56,1258.14 4362.84,1274.81 3993.44,1278.14 4058.74,1279.1 3716.44,1282.76 3919.56,1292.14 4386.88,1298.85 5314.63,1300.39 4082.78,1303.14 5380.31,1305.4 4001.75,1311.11 5040.65,1313.63 3716.44,1316.76 4415.08,1317.85 5263.25,1318.93 3919.56,1326.14 4106.82,1327.19 5295.82,1328.7 5405.06,1328.7 4025.65,1335.29 5436.13,1342.52 4433.92,1346.15 5038.09,1347.54 3716.44,1350.76 4130.86,1351.23 4049.69,1359.33 3919.56,1360.14 5460.17,1366.56 4154.9,1375.27 4426.56,1379.35 5195.93,1378.81 4073.74,1383.37 3716.44,1384.76 5228.88,1387.22 5484.21,1390.6 3919.56,1394.14 5081.82,1397.99 4178.95,1399.31 5259.83,1401.3 5293.83,1401.3 4097.78,1407.41 4426.56,1413.35 5508.25,1414.64 3716.44,1418.76 5413.4,1422.45 4202.99,1423.35 5379.55,1425.59 3919.56,1428.14 5313.69,1428.89 4121.82,1431.45 5347.03,1435.54 5532.29,1438.68 5437.44,1446.49 4227.59,1446.82 4432.51,1446.82 4466.51,1446.82 4500.51,1446.82 4534.51,1446.82 4670.51,1446.82 4704.51,1446.82 4806.51,1446.82 4840.51,1446.82 3716.44,1452.76 4145.86,1455.5 3919.56,1462.14 5304.35,1468.92 5385.74,1469.61 5461.49,1470.53 5541.66,1471.37 5271.79,1478.7 4169.9,1479.54 5072.85,1483.53 3716.44,1486.76 5413.25,1489.58 5195.55,1492.22 5241.51,1494.17 3919.56,1496.14 4967.59,1499.81 4194.2,1503.32 5469.07,1503.68 5541.66,1505.37 4226.67,1513.41 5437.3,1513.63 5217.47,1518.21 3716.44,1520.76 3919.56,1530.14 4958.86,1532.67 4449.97,1535.54 4483.97,1535.54 4517.97,1535.54 4551.97,1535.54 4585.97,1535.54 4619.97,1535.54 4653.97,1535.54 4687.97,1535.54 4721.97,1535.54 4755.97,1535.54 5469.07,1537.68 5541.66,1539.37 4247.55,1540.24 3716.44,1554.76 3942.89,1554.87 4426.56,1560.19 5274.98,1563.36 4271.02,1564.84 5307.82,1572.16 3966.93,1578.91 5372.84,1581.55 5339.08,1585.54 5250.94,1587.4 3716.44,1588.76 4426.56,1594.19 4278.44,1598.02 5060.24,1599.57 3990.98,1602.95 5393.44,1608.6 5226.15,1610.67 5090.45,1615.18 5124.45,1615.18 5158.45,1615.18 5192.45,1615.18 5361.19,1619.37 3716.44,1622.76 4443.38,1623.74 5327.68,1625.12 5578.11,1625.12 4015.02,1627 5710.93,1631.36 4278.44,1632.02 4467.42,1647.79 5063.34,1648.41 4039.06,1651.04 3716.44,1656.76 5715.07,1665.11 4279.65,1666 4491.46,1671.83 4063.1,1675.08 3716.44,1690.76 4300.19,1693.09 4515.5,1695.87 5203.59,1697.71 5237.59,1697.71 5271.59,1697.71 5305.59,1697.71 5705.44,1697.72 4087.14,1699.12 5340.18,1713.7 3794.28,1714.64 4324.23,1717.14 4539.55,1719.91 5306.88,1720.58 4111.18,1723.16 3719.02,1724.66 4807.94,1733.18 4569.99,1735.05 4671.99,1735.05 4705.99,1735.05 3818.32,1738.69 4348.27,1741.18 5282.67,1744.45 4135.23,1747.2 3740.98,1750.62 4967.28,1755.43 5195.93,1760.42 3842.36,1762.73 4372.31,1765.22 5258.63,1768.49 4159.27,1771.25 3765.02,1774.66 5360.4,1786.3 5394.4,1786.3 5461.32,1786.3 3866.41,1786.77 4396.36,1789.26 5427.86,1792.34 5198.83,1794.29 5232.83,1794.29 4183.31,1795.29 4798.59,1798.18 4864.89,1798.18 3789.07,1798.7 5066.93,1800.01 5329.44,1800.35 5491.31,1802.3 5715.11,1809.93 3890.45,1810.81 4420.4,1813.3 4207.35,1819.33 3813.11,1822.74 4965.9,1825.65 5082.86,1830.05 3914.49,1834.85 4444.44,1837.34 4231.39,1843.37 5713.27,1843.88 3837.15,1846.79 3938.53,1858.89 4967.52,1859.62 5067.64,1860.46 4468.48,1861.39 4255.43,1867.41 3861.19,1870.83 3962.57,1882.94 4492.52,1885.43 5587.32,1885.57 4279.48,1891.45 3885.23,1894.87 4522.98,1900.54 4556.98,1900.54 4590.98,1900.54 4624.98,1900.54 4658.98,1900.54 4692.98,1900.54 4726.98,1900.54 4760.98,1900.54 4794.98,1900.54 4828.98,1900.54 4862.98,1900.54 5558.97,1904.34 5524.97,1904.58 3986.61,1906.98 4303.52,1915.49 3909.27,1918.91 5043.92,1920.48 5256.48,1919.61 4010.66,1931.02 4327.56,1939.54 3933.32,1942.95 5232.44,1943.66 5062.6,1948.89 4034.7,1955.06 4351.6,1963.58 3957.36,1966.99 4058.74,1979.1 4375.64,1987.62 3981.4,1991.04 5313.74,2001.07 4082.78,2003.14 5379.59,2004.46 4399.68,2011.66 5040.65,2013.63 4005.44,2015.08 5261.83,2017.51 4106.82,2027.19 5293.93,2028.7 5403.43,2028.7 4428.03,2030.43 4029.48,2039.12 5434.98,2041.37 5038.09,2047.54 4130.86,2051.23 4053.52,2063.16 4432.27,2064.17 5459.02,2065.41 4154.9,2075.27 5195.93,2078.81 4077.57,2087.2 5228.88,2087.22 5483.06,2089.45 4426.56,2097.69 5081.82,2097.99 4178.95,2099.31 5259.83,2101.3 5293.83,2101.3 4101.61,2111.24 5507.11,2113.49 5413.4,2122.45 4202.99,2123.35 5379.55,2125.59 5313.69,2128.89 4426.56,2131.69 4125.65,2135.29 5347.03,2135.54 5531.15,2137.54 5437.44,2146.49 4227.59,2146.82 4457.01,2146.82 4491.01,2146.82 4525.01,2146.82 4695.01,2146.82 4797.01,2146.82 4831.01,2146.82 4865.01,2146.82 4149.69,2159.33 5304.35,2168.92 5385.74,2169.61 5541.66,2169.87 5461.49,2170.53 5271.79,2178.7 4173.73,2183.37 5072.85,2183.53 4967.27,2189.68 5413.25,2189.58 5195.55,2192.22 5241.51,2194.17 5469.07,2203.68 5541.66,2203.87 4199.02,2206.1 5437.3,2213.63 5217.47,2218.21 4229.25,2221.66 4965.12,2223.61 4459.58,2235.54 4493.58,2235.54 4527.58,2235.54 4561.58,2235.54 4595.58,2235.54 4629.58,2235.54 4663.58,2235.54 4697.58,2235.54 4731.58,2235.54 4765.58,2235.54 5469.07,2237.68 5541.66,2237.87 4255.61,2243.13 4426.56,2243.65 5274.98,2263.36 5307.82,2272.16 4272.72,2272.51 4426.56,2277.65 5372.84,2281.55 5339.08,2285.54 5250.94,2287.4 5060.24,2299.57 4278.44,2306.03 5393.44,2308.6 4431,2311.36 5226.15,2310.67 5090.45,2315.18 5124.45,2315.18 5158.45,2315.18 5192.45,2315.18 5361.19,2319.37 5327.68,2325.12 5576.04,2325.12 5709.52,2329.52 4455.04,2335.4 4278.44,2340.03 5063.34,2348.41 4479.08,2359.44 5714.81,2363.11 4282.85,2373.74 4503.12,2383.48 5707.26,2396.26 5203.59,2397.71 5237.59,2397.71 5271.59,2397.71 5305.59,2397.71 4305.87,2398.77 4527.16,2407.53 5340.18,2413.7 5306.88,2420.58 4329.91,2422.81 4822.26,2427.86 4551.2,2431.57 4585.02,2435.05 4687.02,2435.05 4789.02,2435.05 4855.49,2435.05 4956.69,2436.26 5282.67,2444.45 4353.95,2446.85 5195.93,2460.42 4967.59,2468.47 5258.63,2468.49 4377.99,2470.89 5708.1,2485.16 5360.4,2486.3 5394.4,2486.3 5461.32,2486.3 5427.86,2492.34 5198.83,2494.29 5232.83,2494.29 4402.03,2494.94 4784.97,2498.18 4851.77,2498.26 5066.93,2500.01 5329.44,2500.35 5491.31,2502.3 4954.54,2511.38 4426.07,2518.98 5714.64,2518.52 5082.86,2530.05 4450.12,2543.02 4967.59,2542.78 5708.6,2551.98 5067.64,2560.46 4474.16,2567.06 4967.59,2576.78 4498.2,2591.1 5581.63,2591.26 4530.86,2600.54 4564.86,2600.54 4598.86,2600.54 4632.86,2600.54 4666.86,2600.54 4700.86,2600.54 4734.86,2600.54 4768.86,2600.54 4802.86,2600.54 4836.86,2600.54 5550.34,2604.58 5043.92,2620.48 5251.13,2624.96 5062.6,2648.89 5227.09,2649 5090.57,2668.22 5199.07,2668.26 5124.57,2668.72 5165.89,2675.68
  other v2: 3740,-2998.98 4630,-2892.32 4745,-2892.32 2780.95,-2871.26 3174.65,-2871.26 5633.07,-2849.57 5885,-2819.35 3764.53,-2645 4630,-2575 4630,-2508.93 4745,-2508.26 221.89,-2477.56 4630,-2192.32 4745,-2192.32 5663.17,-2185 5885,-2119.35 3962.05,-2083.86 4630,-1875 4630,-1808.93 4745,-1808.26 221.89,-1690.16 4630,-1492.32 4745,-1492.32 5663.17,-1485 5885,-1419.35 418.74,-1296.46 4630,-1175 4630,-1108.93 4745,-1108.26 4630,-792.32 4745,-792.32 5663.17,-785 5885,-719.35 418.74,-509.05 4630,-475 4630,-408.93 4745,-408.26 221.89,-115.35 3765.2,-115.35 4158.9,-115.35 4630,-92.32 4745,-92.32 5663.17,-85 5885,-19.35 4630,225 418.74,278.35 4630,291.07 4745,291.74 4630,607.68 4745,607.68 5663.17,615 221.89,672.05 615.59,672.05 1009.29,672.05 2977.8,672.05 5885,680.65 4630,925 4630,991.07 4745,991.74 3174.65,1065.75 4630,1307.68 4745,1307.68 5663.17,1315 5885,1380.65 3371.5,1459.45 4630,1625 4630,1691.07 4745,1691.74 3174.65,1853.15 3568.35,1853.15 4355.75,1853.15 4630,2007.68 4745,2007.68 5663.17,2015 5885,2080.65 1402.99,2246.85 1796.69,2246.85 2977.8,2246.85 3371.5,2246.85 3765.2,2246.85 4630,2325 4630,2391.07 4745,2391.74 1599.84,2640.55 1993.54,2640.55 3174.65,2640.55 3568.35,2640.55 3962.05,2640.55 4355.75,2640.55 1402.99,3034.25 1796.69,3034.25 2977.8,3034.25 3371.5,3034.25 3765.2,3034.25 4158.9,3034.25 4552.6,3034.25 4946.3,3034.25 5340,3034.25
MC1_15: J1.15 J2.10 | length 1327.4
  Top w8: J2.10@900,1700 900,1625 1240,1285 1542.2,1285 1767.2,1060 J1.15@1767.2,908.82
MC1_16: J1.16 J3.05 | length 3360.1
  Top w8: J3.05@700,-2000 655,-1955 655,-166 1258,437 1625,437 1767.2,579.2 J1.16@1767.2,665.83
MC1_17: J1.17 J2.09 | length 1481.5
  Top w10: J1.17@1798.7,908.82 v2(1798.7,1026)
  Bottom w8: J2.09@900,1800 952,1748 952,1611 1359,1204 1731.21,1204 1798.7,1136.51 v2(1798.7,1026)
MC1_18: J1.18 J3.08 | length 3614.9
  Top w8: J1.18@1798.7,665.83 v2(1798.7,746)
  Bottom w8: J3.08@800,-2100 750,-2050 750,-1904 634,-1788 634,-184 1337,519 1571.7,519 v2(1798.7,746)
MC1_19: J1.19 J2.12 | length 1296.3
  Top w8: J2.12@1000,1700 1000,1615 1281,1334 1556.2,1334 1830.2,1060 J1.19@1830.2,908.82
MC1_20: J1.20 J3.07 | length 3380.2
  Top w8: J3.07@800,-2000 701,-1901 701,-207 1289,381 1640,381 1830.2,571.2 J1.20@1830.2,665.83
MC1_21: J1.21 J2.11 | length 1440.8
  Top w10: J1.21@1861.69,908.82 v2(1861.69,1026)
  Bottom w8: J2.11@1000,1800 1052,1748 1052,1616 1420,1248 1749,1248 1861.69,1135.31 v2(1861.69,1026)
MC1_22: J1.22 J3.10 | length 3647
  Top w8: J1.22@1861.69,665.83 v2(1861.69,746)
  Bottom w8: J3.10@900,-2100 850,-2050 850,-1904 676,-1730 676,-206 1364,482 1597.69,482 v2(1861.69,746)
MC1_23: J1.23 J2.14 | length 1263.9
  Top w8: J2.14@1100,1700 1100,1620 1339,1381 1585.19,1381 1893.19,1073 J1.23@1893.19,908.82
MC1_24: J1.24 J3.09 | length 3391.2
  Top w8: J3.09@900,-2000 748,-1848 748,-250 1328,330 1649,330 1893.19,574.19 J1.24@1893.19,665.83
MC1_25: J1.25 J2.13 | length 1400.9
  Top w10: J1.25@1924.69,908.82 v2(1924.69,1026)
  Bottom w8: J2.13@1100,1800 1152,1748 1152,1616 1480,1288 1766.97,1288 1924.69,1130.29 v2(1924.69,1026)
MC1_26: J1.26 J3.12 | length 3674.9
  Top w8: J1.26@1924.69,665.83 v2(1924.69,746)
  Bottom w8: J3.12@1000,-2100 950,-2050 950,-1904 721,-1675 721,-228 1396,447 1625.69,447 v2(1924.69,746)
MC1_27: J1.27 J2.16 | length 1238.7
  Top w8: J2.16@1200,1700 1200,1615 1391,1424 1620.18,1424 1956.18,1088 J1.27@1956.18,908.82
MC1_28: J1.28 J3.11 | length 3407.7
  Top w8: J3.11@1000,-2000 794,-1794 794,-291 1366,281 1665,281 1956.18,572.18 J1.28@1956.18,665.83
MC1_29: J1.29 J2.15 | length 1360
  Top w10: J1.29@1987.68,908.82 v2(1987.68,1026)
  Bottom w8: J2.15@1200,1800 1251,1749 1251,1614 1538,1327 1781.4,1327 1987.68,1120.72 v2(1987.68,1026)
MC1_30: J1.30 J3.14 | length 3705.2
  Top w8: J1.30@1987.68,665.83 v2(1987.68,746)
  Bottom w8: J3.14@1100,-2100 1050,-2050 1050,-1904 763,-1617 763,-253 1429,413 1654.68,413 v2(1987.68,746)
MC1_31: J1.31 J2.18 | length 1210.9
  Top w8: J2.18@1300,1700 1300,1613 1441,1472 1649,1472 2019.17,1101.83 J1.31@2019.17,908.82
MC1_33: J1.33 J2.17 | length 1320.8
  Top w10: J1.33@2050.67,908.82 v2(2050.67,1060)
  Bottom w8: J2.17@1300,1800 1349,1751 1349,1617 1598,1368 1800.68,1368 2050.67,1118.01 v2(2050.67,1060)
MC1_37: J1.37 J2.20 | length 1188.8
  Top w8: J2.20@1400,1700 1400,1614 1497,1517 1671.16,1517 2113.66,1074.5 J1.37@2113.66,908.82
MC1_39: J1.39 J2.19 | length 1295.9
  Top w10: J1.39@2145.16,908.82 v2(2145.16,1026)
  Bottom w8: J2.19@1400,1800 1451,1749 1451,1617 1658,1410 1822,1410 2145.16,1086.84 v2(2145.16,1026)
MC1_41: J1.41 J2.22 | length 1162.1
  Top w8: J2.22@1500,1700 1500,1609.22 1547.22,1562 1702,1562 2176.65,1087.35 J1.41@2176.65,908.82
MC1_42: J1.42 J3.20 | length 3801.3
  Top w8: J1.42@2176.65,665.83 v2(2176.65,746)
  Bottom w8: J3.20@1400,-2100 1354,-2054 1354,-1910 883,-1439 883,-334 1528,311 1741.65,311 v2(2176.65,746)
MC1_43: J1.43 J2.21 | length 1261.8
  Top w10: J1.43@2208.15,908.82 v2(2208.15,1026)
  Bottom w8: J2.21@1500,1800 1548,1752 1548,1622 1722,1448 1854,1448 2208.15,1093.85 v2(2208.15,1026)
MC1_44: J1.44 J3.19 | length 3478.6
  Top w8: J3.19@1400,-2000 979,-1579 979,-444 1477,54 1697.65,54 2208.15,564.5 J1.44@2208.15,665.83
MC1_45: J1.45 J2.24 | length 1081.3
  Top w8: J2.24@1600,1700 1698,1602 1741,1602 2239.65,1103.35 J1.45@2239.65,908.82
MC1_46: J1.46 J3.22 | length 3826.4
  Top w8: J1.46@2239.65,665.83 v2(2239.65,746)
  Bottom w8: J3.22@1500,-2100 1449,-2049 1449,-1919 930,-1400 930,-356 1561,275 1768.65,275 v2(2239.65,746)
MC1_47: J1.47 J2.23 | length 1228.5
  Top w10: J1.47@2271.14,908.82 v2(2271.14,1026)
  Bottom w8: J2.23@1600,1800 1650,1750 1650,1616.71 1776.71,1490 1878,1490 2271.14,1096.86 v2(2271.14,1026)
MC1_48: J1.48 J3.21 | length 3498.5
  Top w8: J3.21@1500,-2000 1031,-1531 1031,-481 1510,-2 1723,-2 2271.14,546.14 J1.48@2271.14,665.83
MC1_49: J1.49 J2.26 | length 1040.8
  Top w8: J2.26@1700,1700 1961,1439 2302.64,1097.36 J1.49@2302.64,908.82
MC1_50: J1.50 J3.24 | length 3859.1
  Top w8: J1.50@2302.64,665.83 v2(2302.64,746)
  Bottom w8: J3.24@1600,-2100 1547,-2047 1547,-1914 972,-1339 972,-377 1589,240 1796.64,240 v2(2302.64,746)
MC1_51: J1.51 J2.25 | length 1195.4
  Top w10: J1.51@2334.13,908.82 v2(2334.13,1026)
  Bottom w8: J2.25@1700,1800 1750,1750 1750,1616 1835,1531 1906,1531 2334.13,1102.87 v2(2334.13,1026)